# Altium PCB PCB2_Middle.PcbDoc
Units mm, origin at the board's own origin, x right, y up, seen from the top; angles counter-clockwise.
Board outline 140 x 12 mm, 2 copper layers (Top Layer, Bottom Layer); 10 components, 14 nets, 40 pads, 41 vias.
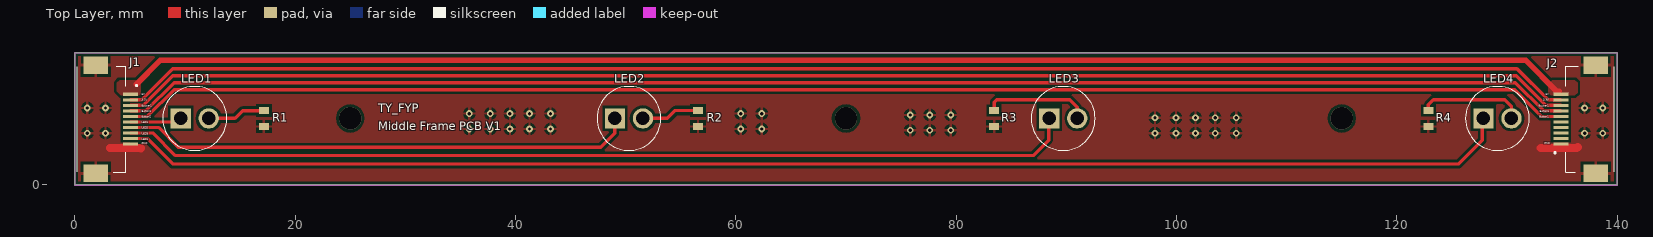
[diagram p0: Top Layer view]
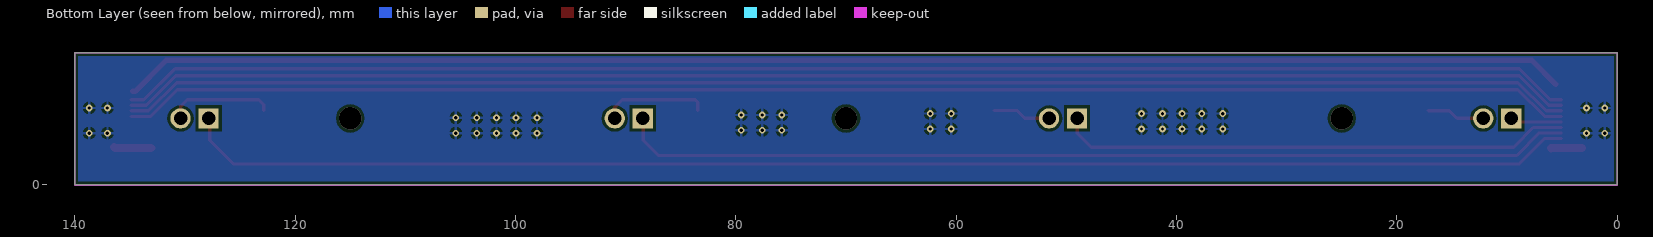
[diagram p1: Bottom Layer view, seen from below]
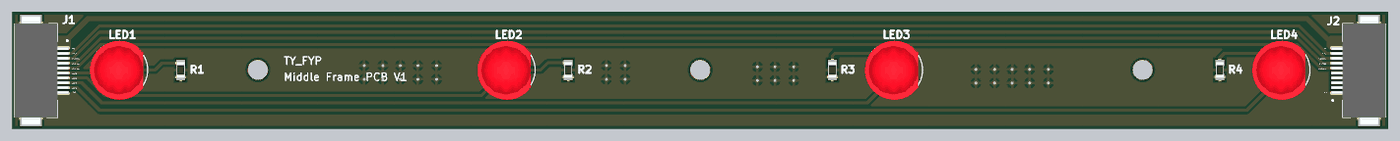
[diagram p2: 3D render of the assembled board from above, using the file's embedded part models]

## Layer stack, top to bottom
Top Solder: solder mask 0.0102, Solder Resist, Dk 3.5
Top Layer: signal copper 0.0356
Dielectric 1: dielectric 0.32, FR-4, Dk 4.8
Bottom Layer: signal copper 0.0356
Bottom Solder: solder mask 0.0102, Solder Resist, Dk 3.5

## Board outline
0,0 0,12 140,12 140,0

## Design rules (kind name [scope] priority, off if disabled: settings)
Clearance [All] p1: gap=0.254 ignorepadtopadclearanceinfootprint=FALSE except(0: Arc-Hole Track-Hole SMDPad-Hole THPad-Hole Via-Hole Fill-Hole Poly-Hole Region-Hole Text-Hole)
PolygonConnect PolygonConnect_1 [InNet('5V')] p1: connectstyle=Direct reliefconductorwidth=0.254 reliefentries=4 polygonreliefangle="90 Angle" airgapwidth=0.254
PolygonConnect [All] p2: connectstyle=Relief reliefconductorwidth=0.254 reliefentries=4 polygonreliefangle="90 Angle" airgapwidth=0.254
RoutingVias [All] p1: holewidth=0.305 width=0.61 viastyle="Through Hole" minholewidth=0.305 minwidth=0.61 maxholewidth=0.711 maxwidth=1.27
SolderMaskExpansion [All] p1: expansion=0.102
Width [All] p1: maxlimit=1.524 minlimit=0.127 preferedwidth=0.254
30 further rules are at their usual default settings.

## Components (designator, comment, footprint, x,y, rotation, side; value= is the part's Value field where it differs from the comment)
J1 "FFC Connector" 528921033 2.413,5.969 r270 top
J2 "FFC Connector" 528921033 137.541,5.969 r90 top
LED1 "5mm Red LED" TLHR_64001 9.62,6.038 r0 top
LED2 "5mm Red LED" TLHR_64001 49.032,6.038 r0 top
LED3 "5mm Red LED" TLHR_64001 88.443,6.038 r0 top
LED4 "5mm Red LED" TLHR_64001 127.855,6.038 r0 top
R1 "0603_300" ERA3KV_(0603) 17.16,6.038 r270 top
R2 "0603_300" ERA3KV_(0603) 56.572,6.038 r270 top
R3 "0603_300" ERA3KV_(0603) 83.443,6.038 r270 top
R4 "0603_300" ERA3KV_(0603) 122.855,6.038 r270 top

## Footprints (in the part's own frame and the unit in brackets; to place one, negate y for a bottom-side part, rotate by r counter-clockwise, add the part's x,y. Pads: shape width x height; smd on the part's side, far side on the other; paste and mask are expansions set on the pad)
528921033 [mm]
  rect 0.3x1.4 smd: 1(-2.25,2.65) 2(-1.75,2.65) 3(-1.25,2.65) 4(-0.75,2.65) 5(-0.25,2.65) 6(0.25,2.65) 7(0.75,2.65) 8(1.25,2.65) 9(1.75,2.65) 10(2.25,2.65)
  rect 1.6x2.2 smd: MP1(-4.9,-0.5) MP2(4.9,-0.5)
  silkscreen extent -4.8,-2.2 4.8,3.25, body extent -5.54,-2.2 5.54,3.32, height 2.1
ERA3KV_(0603) [mm]
  rect 0.65x0.9 smd: 1(-0.725,0) 2(0.725,0)
  body extent -0.8,-0.4 0.8,0.4, height 0.46
TLHR_64001 [mm]
  rect 1.845x1.845 hole 1.23: 1(0,0)
  round 1.845 hole 1.23: 2(2.54,0)
  silkscreen extent -1.63,-2.9 4.17,2.9, body extent -1.69,-3.05 3.73,2.97, height 9.31

## Part data
J1 J2: "Connector", Manufacturer_Name=Molex, Manufacturer_Part_Number=52892-1033, Datasheet Link=https://componentsearchengine.com/Datasheets/2/52892-1033.pdf, Height=2mm
LED1 LED2 LED3 LED4: library part TLHR6400, "LED", Manufacturer_Name=Vishay, Datasheet Link=https://www.vishay.com/docs/83219/tlhg640.pdf, Manufacturer_Part_Number=TLHR6400
R1 R2 R3 R4: library part 0603_R, "Resistor", Manufacturer_Name=Panasonic, Manufacturer_Part_Number=ERA-3KEB2403V, Datasheet Link=http://industrial.panasonic.com/cdbs/www-data/pdf/RDM0000/RDM0000C331.pdf, Height=0.4mm

## Via types
v1: diameter 0.61, hole 0.305, Top Layer to Bottom Layer, tented both sides, 38 vias
v2: diameter 2.032, hole 2.032, Top Layer to Bottom Layer, 3 vias

## Nets (pads, with @x,y where several pads share a name; then routed paths per layer and width w, separated by ;. In a path a pad name is that pad's centre, name@x,y a point inside that pad or via, vN(x,y) a via of type N, cw(c..) or ccw(c..) an arc to the next point about the centre after c; other vN are vias at no path point)
3.3V: J1.2 J2.9 | length 132.2
  Top Layer w0.305: J1.2 6.068,7.719 8.89,10.541 130.899,10.541 133.721,7.719 J2.9
5V: J1.1 J2.10 | length 131.2
  Top Layer w0.508: 5.588,9.144 7.747,11.303 131.699,11.303 134.493,8.509 134.747,8.509
Button1: J1.4 J2.7 | length 131.9
  Top Layer w0.305: J1.4 6.465,6.719 9.017,9.271 130.755,9.271 133.307,6.719 J2.7
Button2: J1.5 J2.6 | length 131.8
  Top Layer w0.305: J1.5 6.6,6.219 9.017,8.636 130.683,8.636 133.1,6.219 J2.6
Buzzer2: J1.3 J2.8 | length 132.1
  Top Layer w0.305: J1.3 6.203,7.219 8.89,9.906 130.827,9.906 133.514,7.219 J2.8
GND: J1.10 J1.MP1 J1.MP2 J2.1 J2.MP1 J2.MP2 R1.2 R2.2 R3.2 R4.2 | length 6.2
  Top Layer w0.762: 3.2,3.353 5.979,3.353 6.017,3.315 ; 133.045,3.353 136.322,3.353 136.398,3.429
  other v1: 1.143,4.699 2.794,4.699 98.044,4.699 99.949,4.699 101.727,4.699 103.505,4.699 105.41,4.699 137.033,4.699 138.684,4.699 75.819,4.953 77.597,4.953 79.502,4.953 35.814,5.08 37.719,5.08 39.497,5.08 41.275,5.08 43.18,5.08 60.452,5.08 62.357,5.08 98.044,6.096 99.949,6.096 101.727,6.096 103.505,6.096 105.41,6.096 75.819,6.35 77.597,6.35 79.502,6.35 35.814,6.477 37.719,6.477 39.497,6.477 41.275,6.477 43.18,6.477 60.452,6.477 62.357,6.477 1.143,6.985 2.794,6.985 137.033,6.985 138.684,6.985
NetJ1_6: J1.6 LED1.1 | length 4.7
  Top Layer w0.305: J1.6 LED1.1@9.301,5.719
  Bottom Layer w0.305: LED1.1@9.301,5.719 LED1.1
NetJ1_7: J1.7 LED2.1 | length 46.6
  Top Layer w0.305: J1.7 7.608,5.219 9.398,3.429 47.752,3.429 49.022,4.699 49.022,6.029 LED2.1
NetJ1_8: J1.8 LED3.1 | length 86.8
  Top Layer w0.305: J1.8 7.092,4.719 9.144,2.667 86.995,2.667 88.392,4.064 88.392,5.987 LED3.1
NetJ1_9: J1.9 LED4.1 | length 126.6
  Top Layer w0.305: J1.9 6.576,4.219 8.89,1.905 125.603,1.905 127.762,4.064 127.762,5.945 LED4.1
NetLED1_2: LED1.2 R1.1 | length 5.3
  Top Layer w0.305: LED1.2 14.547,6.038 15.24,6.731 17.128,6.731 R1.1
NetLED2_2: LED2.2 R2.1 | length 5.3
  Top Layer w0.305: LED2.2 53.79,6.038 54.515,6.763 R2.1
NetLED3_2: LED3.2 R3.1 | length 9.7
  Top Layer w0.305: R3.1 83.443,7.497 83.693,7.747 90.297,7.747 90.983,7.061 LED3.2
NetLED4_2: LED4.2 R4.1 | length 9.6
  Top Layer w0.305: R4.1 122.855,7.285 123.317,7.747 129.794,7.747 130.395,7.146 LED4.2
pads on no net: J2.2 J2.3 J2.4 J2.5
copper on no net:
  other v2: 25,6.038 70,6.038 115,6.038

## Polygon pours and split planes (outlines as drawn)
GND on Top Layer "Top Layer-GND" (solid, remove dead copper, pour order 24): 0.127,11.887 0.127,11.862 0.127,0.127 139.852,0.127 139.878,0.152 139.878,11.862 0.152,11.887
5V on Top Layer "Top Layer-5V" (solid, pour order 20): 133.985,8.128 136.144,8.128 136.398,8.382 136.398,9.271 136.144,9.525 134.112,9.525 133.731,9.144 133.731,8.382
5V on Top Layer "Top Layer-5V 1" (solid, pour order 18): 4.318,8.001 5.715,8.001 5.969,8.255 5.969,9.144 5.588,9.525 4.064,9.525 3.81,9.271 3.81,8.509
GND on Bottom Layer "Bottom Layer-GND" (solid, pour order 26): 0.127,11.887 0.127,0.127 139.878,0.127 139.878,11.887

## Keep-outs
Keep-Out Layer:
  the board outline again, w0.152

## Silkscreen, mask and mechanical layers (free items; w line width, h text height)
Top Overlay:
  text "5V" at 6.096,8.128 h0.13
  text "5V" at 133.498,8.128 h0.13
  text "3.3V" at 6.096,7.62 h0.13
  text "3.3V" at 133.265,7.62 h0.13
  text "Buzzer2" at 6.096,7.112 h0.13
  text "Buzzer2" at 132.863,7.112 h0.13
  text "Button1" at 6.096,6.604 h0.13
  text "TY_FYP" at 27.559,6.604 h0.76
  text "Button1" at 132.948,6.604 h0.13
  text "Button2" at 6.096,6.096 h0.13
  text "Button2" at 132.905,6.096 h0.13
  text "LED1" at 6.096,5.588 h0.13
  text "LED2" at 6.096,5.08 h0.13
  text "Middle Frame PCB V1" at 27.559,4.953 h0.76
  text "LED3" at 6.096,4.572 h0.13
  text "LED4" at 6.096,4.064 h0.13
  text "GND" at 6.096,3.683 h0.13
  text "GND" at 133.371,3.683 h0.13
Mechanical 1:
  the board outline again, w0.152

## Dimensions
0,12 to 0,0 on Mechanical 13
140,0 to 0,0 on Mechanical 13